# Altium PCB PCB2.PcbDoc
Units mm, origin at the board's own origin, x right, y up, seen from the top; angles counter-clockwise.
Board outline 85.2 x 58.2 mm, 2 copper layers (Top Layer, Bottom Layer); 34 components, 24 nets, 109 pads, 31 vias.
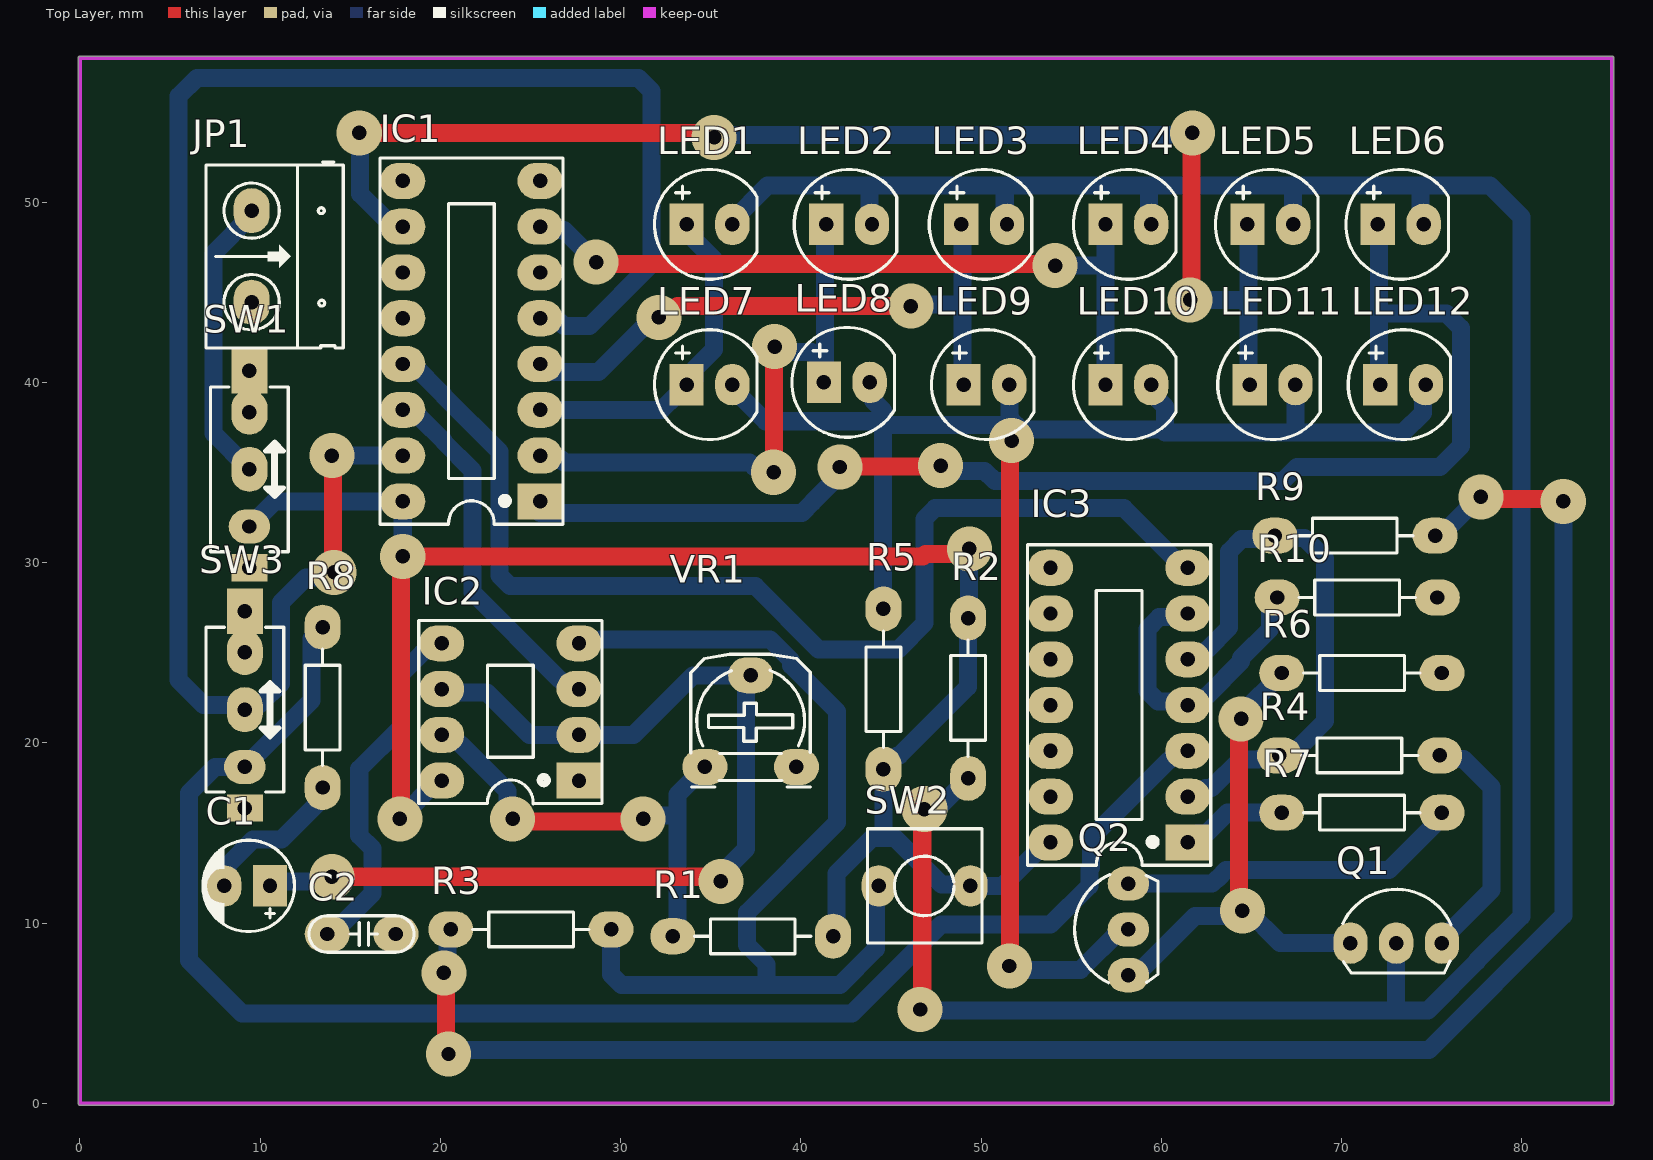
[diagram p0: Top Layer view]
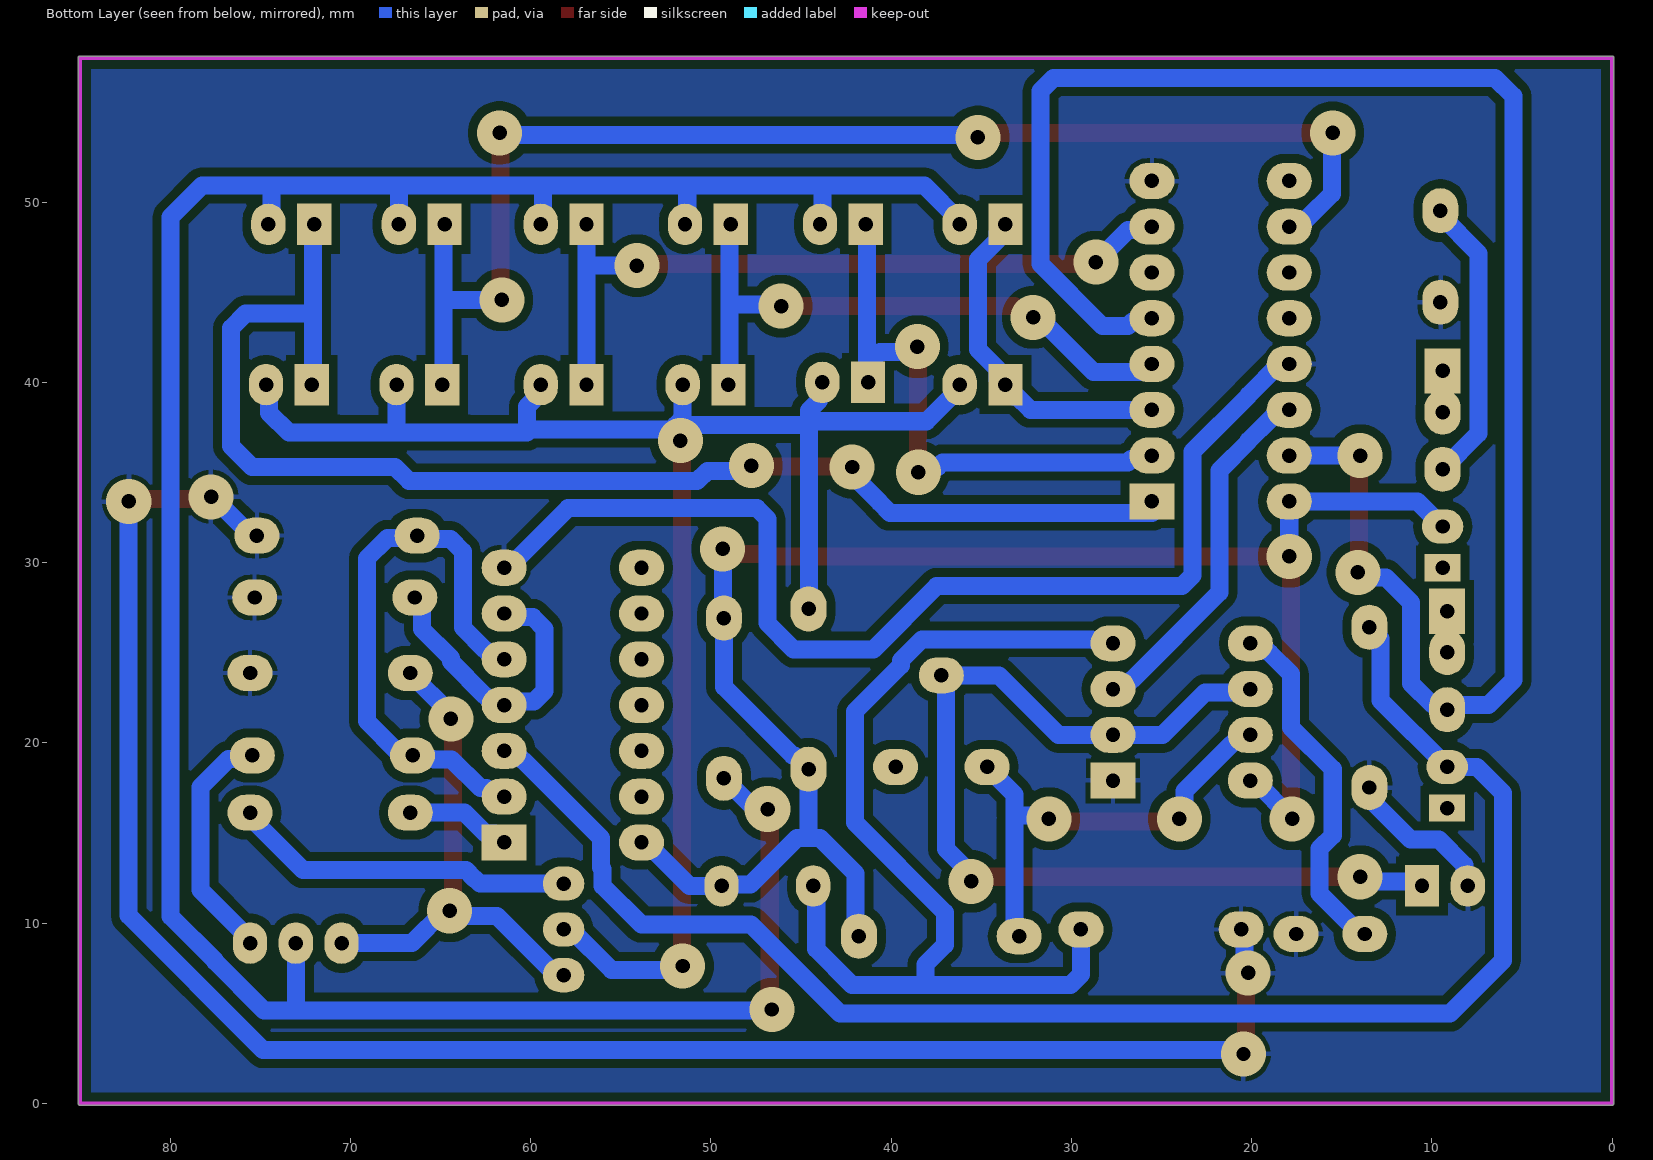
[diagram p1: Bottom Layer view, seen from below]
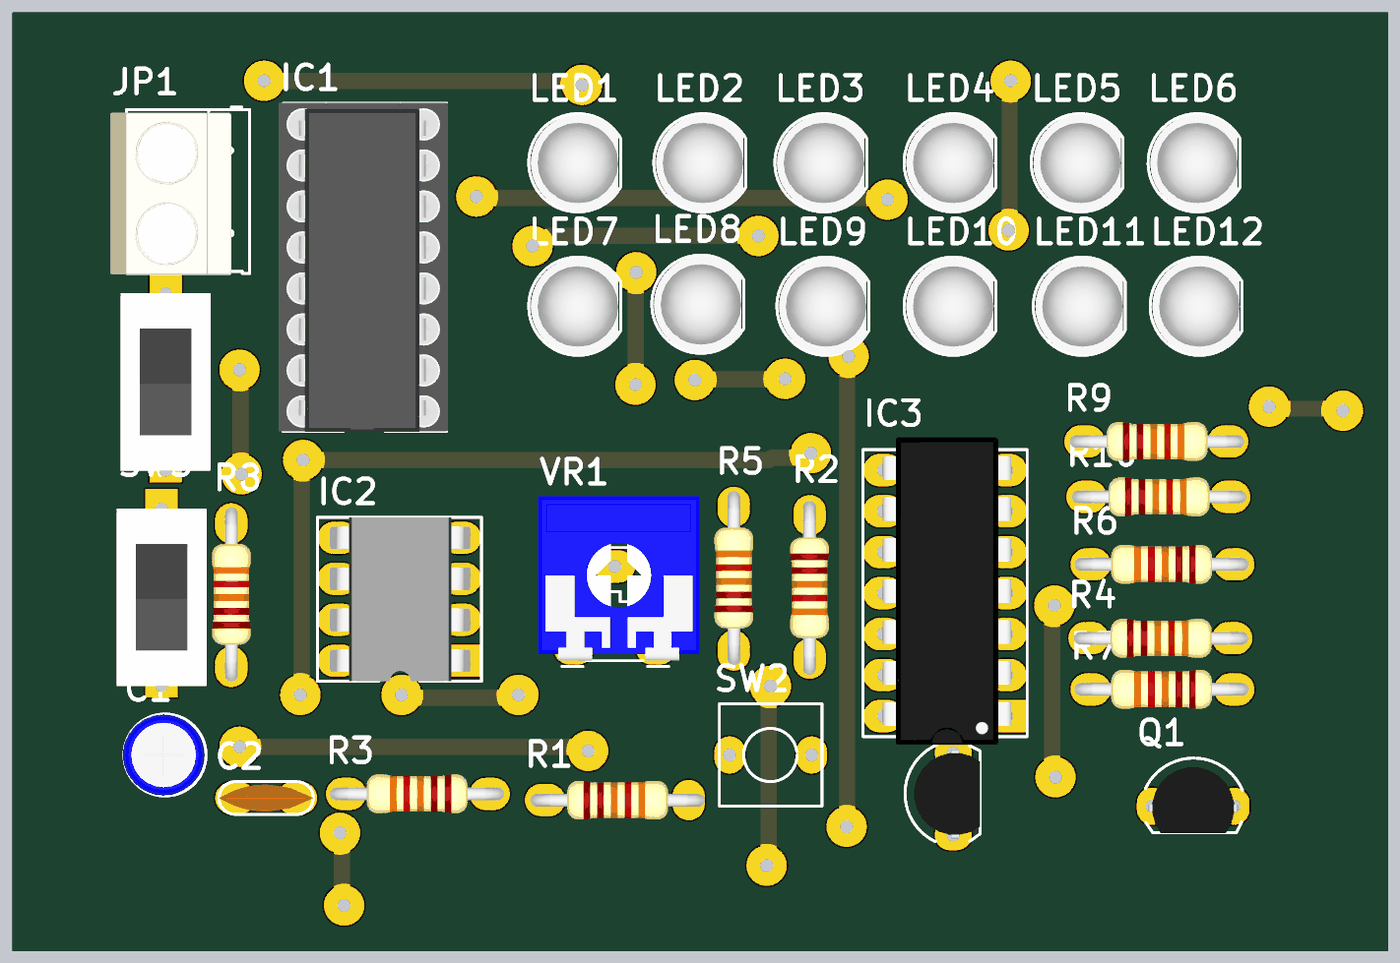
[diagram p2: 3D render of the assembled board from above, using the file's embedded part models]

## Layer stack, top to bottom
Top Solder: solder mask 0.0102, Solder Resist, Dk 3.5
Top Layer: signal copper 0.0356
Dielectric 1: dielectric 0.32, FR-4, Dk 4.8
Bottom Layer: signal copper 0.0356
Bottom Solder: solder mask 0.0102, Solder Resist, Dk 3.5

## Board outline
0,-0.1 cw(c0,0) -0.1,0 -0.1,58 cw(c0,58) 0,58.1 85,58.1 cw(c85,58) 85.1,58 85.1,0 cw(c85,0) 85,-0.1

## Design rules (kind name [scope] priority, off if disabled: settings)
Clearance [All] p1: gap=0.5 ignorepadtopadclearanceinfootprint=FALSE
PlaneConnect [All] p1: planeconnectstyle=Relief reliefexpansion=1 reliefentries=4 reliefconductorwidth=1 reliefairgap=0.8
PolygonConnect [All] p1: connectstyle=Relief reliefconductorwidth=0.254 reliefentries=4 polygonreliefangle="90 Angle" airgapwidth=0.254
RoutingVias [All] p1: holewidth=0.711 width=1.27 viastyle="Through Hole" minholewidth=0.711 minwidth=1.27 maxholewidth=0.711 maxwidth=1.27
SolderMaskExpansion [All] p1: expansion=0.102 istentingtop=FALSE
Width [All] p1: maxlimit=1 minlimit=1 preferedwidth=1
29 further rules are at their usual default settings.

## Components (designator, comment, footprint, x,y, rotation, side; value= is the part's Value field where it differs from the comment)
C1 "0.1uF" CP1/2 10.541,12.065 r180 top value=10uF/50V
C2 "1nF" CN1.5 17.526,9.398 r180 top value=0.01uF
IC1 "4017" Dip16/w0.3 25.527,33.401 r90 top value=CD4017
IC2 "LM555" DIP8/W0.3 27.686,17.907 r90 top
IC3 "CD4013" DIP14/W0.3 61.468,14.478 r90 top
JP1 "Header 2_1" HED2 9.525,49.53 r270 top value="Header 2"
LED1 "LED" LED-5-RED 33.655,48.768 r0 top value="LED 3 ly Single Colour"
LED2 "LED" LED-5-RED 41.402,48.768 r0 top value="LED 3 ly Single Colour"
LED3 "LED" LED-5-RED 48.895,48.768 r0 top value="LED 3 ly Single Colour"
LED4 "LED" LED-5-RED 56.896,48.768 r0 top value="LED 3 ly Single Colour"
LED5 "LED" LED-5-RED 64.77,48.768 r0 top value="LED 3 ly Single Colour"
LED6 "LED" LED-5-RED 72.009,48.768 r0 top value="LED 3 ly Single Colour"
LED7 "LED" LED-5-RED 33.655,39.878 r0 top value="LED 3 ly Single Colour"
LED8 "LED" LED-5-RED 41.275,40.005 r0 top value="LED 3 ly Single Colour"
LED9 "LED" LED-5-RED 49.022,39.878 r0 top value="LED 3 ly Single Colour"
LED10 "LED" LED-5-RED 56.896,39.878 r0 top value="LED 3 ly Single Colour"
LED11 "LED" LED-5-RED 64.897,39.878 r0 top value="LED 3 ly Single Colour"
LED12 "LED" LED-5-RED 72.136,39.878 r0 top value="LED 3 ly Single Colour"
Q1 "C1815" QTO-92 73.025,8.89 r0 top
Q2 "C1815" QTO-92 58.166,9.652 r90 top
R1 "100k" R1/4W#1 41.783,9.271 r180 top value="R1/4W - 1K"
R2 "10k" R1/4W#2 49.276,18.034 r90 top value="R1/4W - 1K"
R3 "2.2K" R1/4W#2 20.574,9.652 r0 top value="R1/4W - 1K"
R4 "270" R1/4W#2 75.438,19.304 r180 top value="R1/4W - 1K"
R5 "10k" R1/4W#2 44.577,27.432 r270 top value="R1/4W - 1K"
R6 "311" R1/4W#2 66.675,23.876 r0 top value="R1/4W - 1K"
R7 "270" R1/4W#2 66.675,16.129 r0 top value="R1/4W - 1K"
R8 "10k" R1/4W#2 13.462,26.416 r270 top value="R1/4W - 1K"
R9 "10k" R1/4W#2 75.184,31.496 r180 top value="R1/4W - 1K"
R10 "10k" R1/4W#2 75.311,28.067 r180 top value="R1/4W - 1K"
SW1 "SW102A" SW102 9.398,33.147 r90 top value="Switch 102 On Board"
SW2 "SW" SW2 44.323,12.065 r0 top value="SW chip 2 pin"
SW3 "SW102A" SW102 9.144,19.812 r90 top value="Switch 102 On Board"
VR1 "670K" VR 34.671,18.669 r0 top value="VR 10K"

## Footprints (in the part's own frame and the unit in brackets; to place one, negate y for a bottom-side part, rotate by r counter-clockwise, add the part's x,y. Pads: shape width x height; smd on the part's side, far side on the other; paste and mask are expansions set on the pad)
CN1.5 [mm]
  oval 2.5x2 hole 0.8: 1(0,0) 2(3.81,0)
  silkscreen extent -1.01,-1.02 4.82,1.02, body extent -1.01,-0.85 4.83,0.85, height 5.97
CP1/2 [mm] "Tu hoa < 22uF/16>50V"
  rect 1.9x2.3 hole 0.8: 1(0,0)
  oval 1.9x2.3 hole 0.8: 2(2.54,0)
  silkscreen extent -1.36,-2.54 3.72,2.54, body extent -1.26,-2.53 3.8,2.53, height 7.29
DIP8/W0.3 [mm] "8 PIN, W 300mil, Pin to pin 100mil"
  rect 2x2.5 hole 0.8: 1(0,0)
  oval 2x2.5 hole 0.8: 2(2.54,0) 3(5.08,0) 4(7.62,0) 5(7.62,7.62) 6(5.08,7.62) 7(2.54,7.62) 8(0,7.62)
  silkscreen extent -1.28,-1.27 8.89,8.89, body extent -1.27,-1.02 8.89,8.54, height 5.11
DIP14/W0.3 [mm] "14PIN, W 300mil, Pin to pin 100mil"
  rect 2x2.5 hole 0.8: 1(0,0)
  oval 2x2.5 hole 0.8: 2(2.54,0) 3(5.08,0) 4(7.62,0) 5(10.16,0) 6(12.7,0) 7(15.24,0) 8(15.24,7.62) 9(12.7,7.62) 10(10.16,7.62) 11(7.62,7.62) 12(5.08,7.62) 13(2.54,7.62) 14(0,7.62)
  silkscreen extent -1.28,-1.27 16.51,8.89, body extent -1.78,-0.32 17.27,7.68, height 3.7
Dip16/w0.3 [mm] "16 PIN, W 300mil, Pin to pin 100mil"
  rect 2x2.5 hole 0.8: 1(0,0)
  oval 2x2.5 hole 0.8: 2(2.54,0) 3(5.08,0) 4(7.62,0) 5(10.16,0) 6(12.7,0) 7(15.24,0) 8(17.78,0) 9(17.78,7.62) 10(15.24,7.62) 11(12.7,7.62) 12(10.16,7.62) 13(7.62,7.62) 14(5.08,7.62) 15(2.54,7.62) 16(0,7.62)
  silkscreen extent -1.28,-1.27 19.05,8.89, body extent -1.31,-1.36 19.09,9.14, height 8.06
HED2 [mm] "Header 2, 2 pin, hight 300mil, Pin to Pin 200, Colour Green"
  oval 2.5x2 hole 0.8: 1(0,0) 2(5.08,0)
  silkscreen extent -2.69,-2.54 7.62,5.08, body extent -2.33,-3.56 7.67,3.94, height 10
LED-5-RED [mm] "LED 2 PIN, 5 ly , Only colour,pin to pin 100mil"
  rect 1.9x2.3 hole 0.8: 1(0,0)
  oval 1.9x2.3 hole 0.8: 2(2.54,0)
  silkscreen extent -1.77,-3.05 3.91,3.04, body extent -1.64,-3.02 3.78,3, height 8.62
QTO-92 [mm] "TO-92"
  oval 1.9x2.3 hole 0.8: 1(-2.54,0) 2(0,0) 3(2.54,0)
  silkscreen extent -2.96,-1.65 3.05,2.99, body extent -2.77,-1.67 2.77,2.41, height 6.22
R1/4W#1 [mm] "R 1/4W, 2 Pin, 350mil"
  oval 2x2.5 hole 0.8: 1(0,0)
  oval 2.5x2 hole 0.8: 2(8.89,0)
  silkscreen extent 1.22,-0.97 7.67,0.97, body extent -1.01,-1.19 9.79,1.21, height 2.83
R1/4W#2 [mm] "R 1/4W, 2 Pin, 350mil"
  oval 2.5x2 hole 0.8: 1(0,0) 2(8.89,0)
  silkscreen extent 1.22,-0.97 7.67,0.97, body extent -1.01,-1.19 9.79,1.21, height 2.83
SW2 [mm] "SW button 2pin, 250x 250 mil"
  oval 1.9x2.3 hole 0.8: 1(0,0) 2(5.08,0)
  silkscreen extent -0.64,-3.17 5.71,3.17
SW102 [mm] "Switch 102 On Board nho"
  oval 1.9x2.3 hole 0.8: 1(-1.143,0)
  oval 2.5x2 hole 0.8: 2(2.032,0) 3(5.207,0)
  rect 2.5x2 hole 0.8: 4(7.493,0)
  rect 1.5x2 hole 0.8: 5(-3.429,0)
  silkscreen extent -2.54,-2.16 6.6,2.16, body extent -3.47,-2.79 7.53,2.79, height 9.74
VR [mm] "Resistor Variable"
  oval 2.5x2 hole 0.8: 1(0,0) 2(2.54,5.08) 3(5.08,0)
  silkscreen extent -0.79,-1.12 5.87,6.25, body extent -2.21,-0.76 7.79,9.44, height 4.2

## Part data
C1: library part CP1, "Cap P  0,1uF < 22uF , 16 - 50V", Description 1="10 => 220uF/6,3V/10V - 10uF => 100uF/16V", Description 2="0,1uF => 33uF/50V - 10uF => 22uF/63V", Description 3="0,47uF => 10uF/100V"
C2: library part CN1.5, "Cap np 682pF => 104pF"
IC1: "Decade Counter/Divider with 10 Decoded Outputs", Designed by=VanDungEvn
IC2: "Timer"
IC3: library part CD4013B, "Dual D-Type Flip-Flop", Creat by=VanDungEvn@Gmail.com
JP1: "Header, 2-Pin", Manufacturer="Generic Components", Class=Connector
LED1 LED2 LED3 LED4 LED5 LED6 LED7 LED8 LED9 LED10 LED11 LED12: "LED Single colour Green and Red"
Q1 Q2: "NPN 600mW, ECB"
R1 R2 R3 R4 R5 R6 R7 R8 R9 R10: library part R1/4W, "Resistor 1/4W"
SW1 SW3: "Switch 102 on Broad"
SW2: library part SW2, "Switch button 2 pin"
VR1: library part VR1, "Var Resistor"

## Via types
v1: diameter 2.5, hole 0.8, Top Layer to Bottom Layer, 30 vias
v2: diameter 2.55, hole 0.8, Top Layer to Bottom Layer, 1 vias

## Nets (pads, with @x,y where several pads share a name; then routed paths per layer and width w, separated by ;. In a path a pad name is that pad's centre, name@x,y a point inside that pad or via, vN(x,y) a via of type N, cw(c..) or ccw(c..) an arc to the next point about the centre after c; other vN are vias at no path point)
GND: C1.2 C2.1 IC1.8 IC1.13 IC2.1 IC3.7 JP1.2 R3.1 R6.2 R8.2 R9.1 R10.1 | length 173.6
  Top Layer w1: v1(20.193,7.239) 20.32,7.112 20.32,2.866 v1(20.447,2.739) ; v1(77.724,33.655) 77.851,33.528 82.169,33.528 v1(82.296,33.401)
  Bottom Layer w1: C1.2 8.173,12.237 8.173,13.211 9.595,14.633 11.183,14.633 R8.2@13.326,16.776 ; R8.2 R8.2@13.634,17.698 ; IC1.13 18.445,41.021 20.157,39.309 20.157,39.279 23.277,36.159 23.277,29.288 23.863,28.702 37.465,28.702 40.985,25.182 45.405,25.182 46.863,26.64 46.863,32.434 47.449,33.02 57.916,33.02 61.218,29.718 IC3.7 ; v1(20.193,7.239) 20.383,7.429 20.383,9.461 R3.1 ; v1(20.447,2.739) 20.665,2.957 74.839,2.957 82.296,10.414 v1(82.296,33.401) ; R9.1 75.499,31.496 77.658,33.655 v1(77.724,33.655)
NetC1_1: C1.1 IC2.2 IC2.6 VR1.2 | length 57
  Top Layer w1: v1(13.97,12.573) 35.306,12.573 v1(35.56,12.319)
  Bottom Layer w1: C1.1 10.795,12.319 13.716,12.319 v1(13.97,12.573) ; IC2.6 20.257,22.796 22.587,22.796 24.936,20.447 IC2.2 30.702,20.447 34.004,23.749 VR1.2 36.957,23.495 36.957,14.122 35.56,12.725 v1(35.56,12.319)
NetC2_2: C2.2 IC2.5 | length 19.8
  Bottom Layer w1: C2.2@13.275,8.957 C2.2@13.275,8.963 ; C2.2 13.977,9.398 16.22,11.641 16.22,14.13 15.494,14.856 15.494,18.542 17.816,20.864 17.816,23.815 18.988,24.987 19.005,24.987 19.545,25.527 IC2.5
NetIC1_1: IC1.1 LED6.1 LED12.1 | length 74
  Top Layer w1: v1(42.164,35.306) 42.201,35.343 47.715,35.343 v1(47.752,35.381)
  Bottom Layer w1: IC1.1@25.527,32.766 40.054,32.766 40.64,33.352 40.64,33.376 42.164,34.9 v1(42.164,35.306) ; v1(47.752,35.381) 48.039,35.094 50.183,35.094 50.757,34.52 66.733,34.52 67.519,35.306 75.465,35.306 76.626,36.467 76.626,43.008 75.819,43.815 72.072,43.815 ; LED6.1 72.072,48.704 72.072,43.815 ; LED12.1 72.072,39.941 72.072,43.815
NetIC1_2: IC1.2 LED2.1 LED8.1 | length 31.7
  Top Layer w1: v1(38.487,35.016) 38.512,35.04 38.512,41.958 v1(38.536,41.982)
  Bottom Layer w1: IC1.2 25.718,35.75 26.673,35.75 26.863,35.56 37.151,35.56 37.408,35.303 38.2,35.303 v1(38.487,35.016) ; v1(38.536,41.982) 38.823,41.695 40.617,41.695 40.87,41.441 ; LED8.1 41.338,40.069 41.338,41.441 41.338,41.91 41.338,48.704 LED2.1
NetIC1_3: IC1.3 LED1.1 LED7.1 | length 19
  Bottom Layer w1: IC1.3 32.258,38.481 33.005,39.228 33.205,39.228 34.105,40.128 34.105,40.746 35.179,41.82 35.179,46.826 34.105,47.9 34.105,48.318 LED1.1
NetIC1_4: IC1.4 LED3.1 LED9.1 | length 33.7
  Top Layer w1: v1(32.116,43.61) 32.522,43.61 33.144,44.232 v1(46.101,44.232)
  Bottom Layer w1: IC1.4@25.718,40.577 28.766,40.577 31.799,43.61 v1(32.116,43.61) ; v1(46.101,44.232) 46.192,44.323 48.959,44.323 ; LED3.1 48.959,48.704 48.959,44.323 ; LED9.1 48.959,39.941 48.959,44.323
NetIC1_5: IC1.5 IC1.15 SW3.2 | length 101.7
  Top Layer w1: v1(13.97,35.941) 14.034,35.877 14.034,29.527 v1(14.097,29.464)
  Bottom Layer w1: SW3.2 8.89,22.098 6.858,22.098 5.461,23.495 5.461,55.88 6.481,56.9 30.984,56.9 31.705,56.179 31.705,46.564 28.258,43.117 26.863,43.117 26.61,43.37 25.971,43.37 IC1.5@25.718,43.117 ; SW3.2@9.525,22.134 9.972,22.134 11.144,23.306 11.144,25.462 11.144,27.781 12.54,29.177 13.81,29.177 v1(14.097,29.464) ; v1(13.97,35.941) IC1.15
NetIC1_7: IC1.7 LED4.1 LED10.1 | length 41.2
  Top Layer w1: v1(28.635,46.676) 28.732,46.579 54.005,46.579 v1(54.102,46.482)
  Bottom Layer w1: IC1.7 25.718,48.45 26.861,48.45 v1(28.635,46.676) ; v1(54.102,46.482) 56.896,46.482 ; LED10.1 56.896,46.482 ; LED4.1 56.896,46.482
NetIC1_10: IC1.10 LED5.1 LED11.1 | length 74.5
  Top Layer w1: v1(15.494,53.848) 34.925,53.848 v1(35.179,53.594) ; v1(61.595,44.577) 61.658,44.64 61.658,53.785 v1(61.722,53.848)
  Bottom Layer w1: v1(15.494,53.848) 15.547,53.795 15.547,50.463 16.829,49.181 16.846,49.181 17.386,48.641 IC1.10 ; v1(35.179,53.594) 35.306,53.721 61.595,53.721 v1(61.722,53.848) ; v1(61.595,44.577) 64.834,44.577 ; LED5.1 64.834,48.704 64.834,44.577 ; LED11.1 64.834,39.941 64.834,44.577
NetIC1_14: IC1.14 IC2.3 | length 20.2
  Bottom Layer w1: IC1.14 18.428,38.481 18.968,37.941 18.985,37.941 20.157,36.769 20.157,36.739 21.777,35.119 21.777,28.358 26.608,23.527 26.625,23.527 27.165,22.987 IC2.3
NetIC2_4: IC2.4 R3.2 SW2.1 | length 55.8
  Bottom Layer w1: IC2.4 27.877,25.718 28.834,25.718 28.865,25.749 38.289,25.749 39.461,24.577 39.461,24.293 42.001,21.753 42.001,15.578 37.02,10.597 37.02,8.776 38.1,7.696 38.1,6.566 ; R3.2 29.464,7.152 30.05,6.566 38.1,6.566 ; SW2.1 44.151,11.893 44.151,8.56 42.157,6.566 38.1,6.566
NetIC2_7: IC2.7 R1.2 VR1.1 | length 25.9
  Top Layer w1: v1(24.003,15.788) 24.161,15.63 31.084,15.63 v1(31.242,15.788)
  Bottom Layer w1: IC2.7 20.587,20.447 21.127,19.907 21.144,19.907 23.716,17.335 23.716,16.075 v1(24.003,15.788) ; v1(31.242,15.788) 31.421,15.967 33.147,15.967 33.147,17.145 VR1.1 ; R1.2 33.147,9.525 33.147,15.748
NetIC3_1: IC3.1 R7.1 | length 5.9
  Bottom Layer w1: IC3.1 61.968,14.978 62.506,14.978 63.657,16.129 R7.1
NetIC3_2: IC3.2 IC3.5 R4.2 R9.2 | length 31.6
  Bottom Layer w1: IC3.2 61.989,17.018 62.457,17.487 62.785,17.487 64.379,19.081 65.368,19.081 65.4,19.113 66.357,19.113 R4.2 ; IC3.5@61.535,24.705 62.056,24.705 62.529,25.178 62.546,25.178 63.762,26.394 63.762,30.615 64.452,31.305 66.237,31.305 66.375,31.443 66.452,31.365 67.949,31.365 69.088,30.226 69.088,21.209 67.374,19.495 66.739,19.495 R4.2@66.615,19.371
NetIC3_3: IC3.3 R8.1 SW3.1 | length 86.7
  Bottom Layer w1: R8.1 12.837,25.791 12.837,22.362 9.137,18.662 7.486,18.662 6.051,17.227 6.051,7.919 8.981,4.989 42.835,4.989 47.761,9.915 53.857,9.915 56.016,12.074 56.016,13 56.098,13.082 56.098,14.726 60.39,19.018 60.407,19.018 60.947,19.558 IC3.3
NetIC3_4: IC3.4 IC3.6 R10.2 | length 17
  Bottom Layer w1: IC3.6 61.277,26.987 59.88,26.987 59.218,26.325 59.218,22.875 59.804,22.289 61.277,22.289 IC3.4 61.989,22.098 62.529,22.638 62.546,22.638 64.425,24.517 64.425,24.704 66.036,26.316 66.036,27.682 R10.2
NetJP1_1: JP1.1 SW1.2 | length 16.1
  Bottom Layer w1: SW1.2 7.398,37.179 7.398,47.153 9.525,49.28 JP1.1
NetLED1_2: LED1.2 LED2.2 LED3.2 LED4.2 LED5.2 LED6.2 Q1.2 R2.1 | length 148.9
  Top Layer w1: v1(46.609,5.207) 46.73,5.328 46.73,16.206 v2(46.852,16.328)
  Bottom Layer w1: LED1.2 36.195,48.968 38.145,50.918 43.815,50.918 ; LED2.2 43.815,48.895 43.815,50.918 ; v1(46.609,5.207) 46.654,5.162 73.025,5.162 ; v2(46.852,16.328) 47.149,16.624 47.846,16.624 49.255,18.034 R2.1 ; LED3.2 51.308,48.895 51.308,50.918 ; LED4.2 59.309,48.895 59.309,50.918 ; LED5.2 67.31,50.918 ; Q1.2 73.025,5.162 ; LED6.2 74.377,48.94 74.377,50.918 ; 43.815,50.918 51.308,50.918 ; 51.308,50.918 59.309,50.918 ; 59.309,50.918 67.31,50.918 ; 67.31,50.918 74.377,50.918 ; 73.025,5.162 74.795,5.162 77.515,7.882 77.515,7.923 79.974,10.382 79.974,49.185 78.241,50.918 74.377,50.918
NetLED7_2: LED7.2 LED8.2 LED9.2 LED10.2 LED11.2 LED12.2 Q2.2 R5.1 | length 98.9
  Top Layer w1: v1(51.562,7.62) 51.598,7.656 51.598,36.679 v1(51.689,36.77)
  Bottom Layer w1: LED7.2 36.195,39.678 38.027,37.846 44.545,37.846 ; LED8.2 43.987,39.833 43.987,38.996 44.545,38.438 44.545,37.846 ; 44.545,37.631 v1@51.562,37.631 ; R5.1 44.545,27.464 44.545,37.846 ; v1(51.562,7.62) 51.77,7.412 55.508,7.412 57.748,9.652 Q2.2 ; LED9.2 51.562,38.016 v1@51.947,37.631 ; v1(51.689,36.77) 51.947,37.028 v1@51.947,37.631 ; LED10.2 59.436,39.434 60.198,38.672 60.198,37.602 ; 60.198,37.211 73.401,37.211 74.504,38.314 74.504,39.706 LED12.2 ; 60.198,37.381 52.197,37.381 v1@51.947,37.631 ; 67.437,37.728 LED11.2
NetQ1_1: Q1.1 Q2.1 R6.1 | length 28.8
  Top Layer w1: v1(64.422,21.331) 64.298,21.208 64.298,10.886 v1(64.496,10.688)
  Bottom Layer w1: Q2.1 58.584,7.112 61.873,10.401 64.209,10.401 v1(64.496,10.688) 64.788,10.688 66.587,8.89 Q1.1 ; v1(64.422,21.331) 64.422,21.602 66.675,23.855 R6.1
NetQ1_3: Q1.3 R4.1 | length 12.9
  Bottom Layer w1: Q1.3 75.565,9.09 78.323,11.848 78.323,17.559 76.769,19.113 R4.1@75.878,19.113
NetQ2_3: Q2.3 R7.2 | length 19.5
  Bottom Layer w1: Q2.3 62.818,12.192 63.104,12.478 63.132,12.478 63.592,12.938 72.632,12.938 75.823,16.129 R7.2@76.073,16.129
VDD: IC1.16 IC2.8 IC3.14 R1.1 R2.2 R5.2 SW1.1 SW2.2 | length 97.9
  Top Layer w1: v1(17.744,15.788) 17.816,15.86 17.816,30.262 v1(17.907,30.353) 46.769,30.353 46.899,30.483 49.061,30.483 v1(49.348,30.77)
  Bottom Layer w1: SW1.1 10.795,33.401 IC1.16 v1(17.907,30.353) ; v1(17.744,15.788) 17.744,15.812 19.839,17.907 IC2.8 ; R1.1 41.974,9.462 41.974,12.764 43.942,14.732 45.212,14.732 47.809,12.135 49.333,12.135 SW2.2 51.181,12.065 53.594,14.478 IC3.14 ; 44.577,14.732 R5.2 ; R5.2@44.768,18.605 44.768,18.713 45.348,19.292 45.456,19.292 49.276,23.112 R2.2 49.312,26.96 49.312,30.734 v1(49.348,30.77)
pads on no net: IC1.6 IC1.9 IC1.11 IC1.12 IC3.8 IC3.9 IC3.10 IC3.11 IC3.12 IC3.13 SW1.3 SW1.4 SW1.5 SW3.3 SW3.4 SW3.5 VR1.3

## Polygon pours and split planes (outlines as drawn)
GND on Bottom Layer "GND_L02_P000" (solid, pour order 0): 0,0 85.09,0 85.09,58.039 0,58.039

## Keep-outs
Keep-Out Layer:
  lines w0.2: 0,0 0,58 85,58 85,0 0,0